# Altium PCB PCB1.PcbDoc
Units mm, origin at the board's own origin, x right, y up, seen from the top; angles counter-clockwise.
Board outline 133.35 x 94.25 mm, 2 copper layers (Top Layer, Bottom Layer); 32 components, 22 nets, 83 pads, 15 vias.
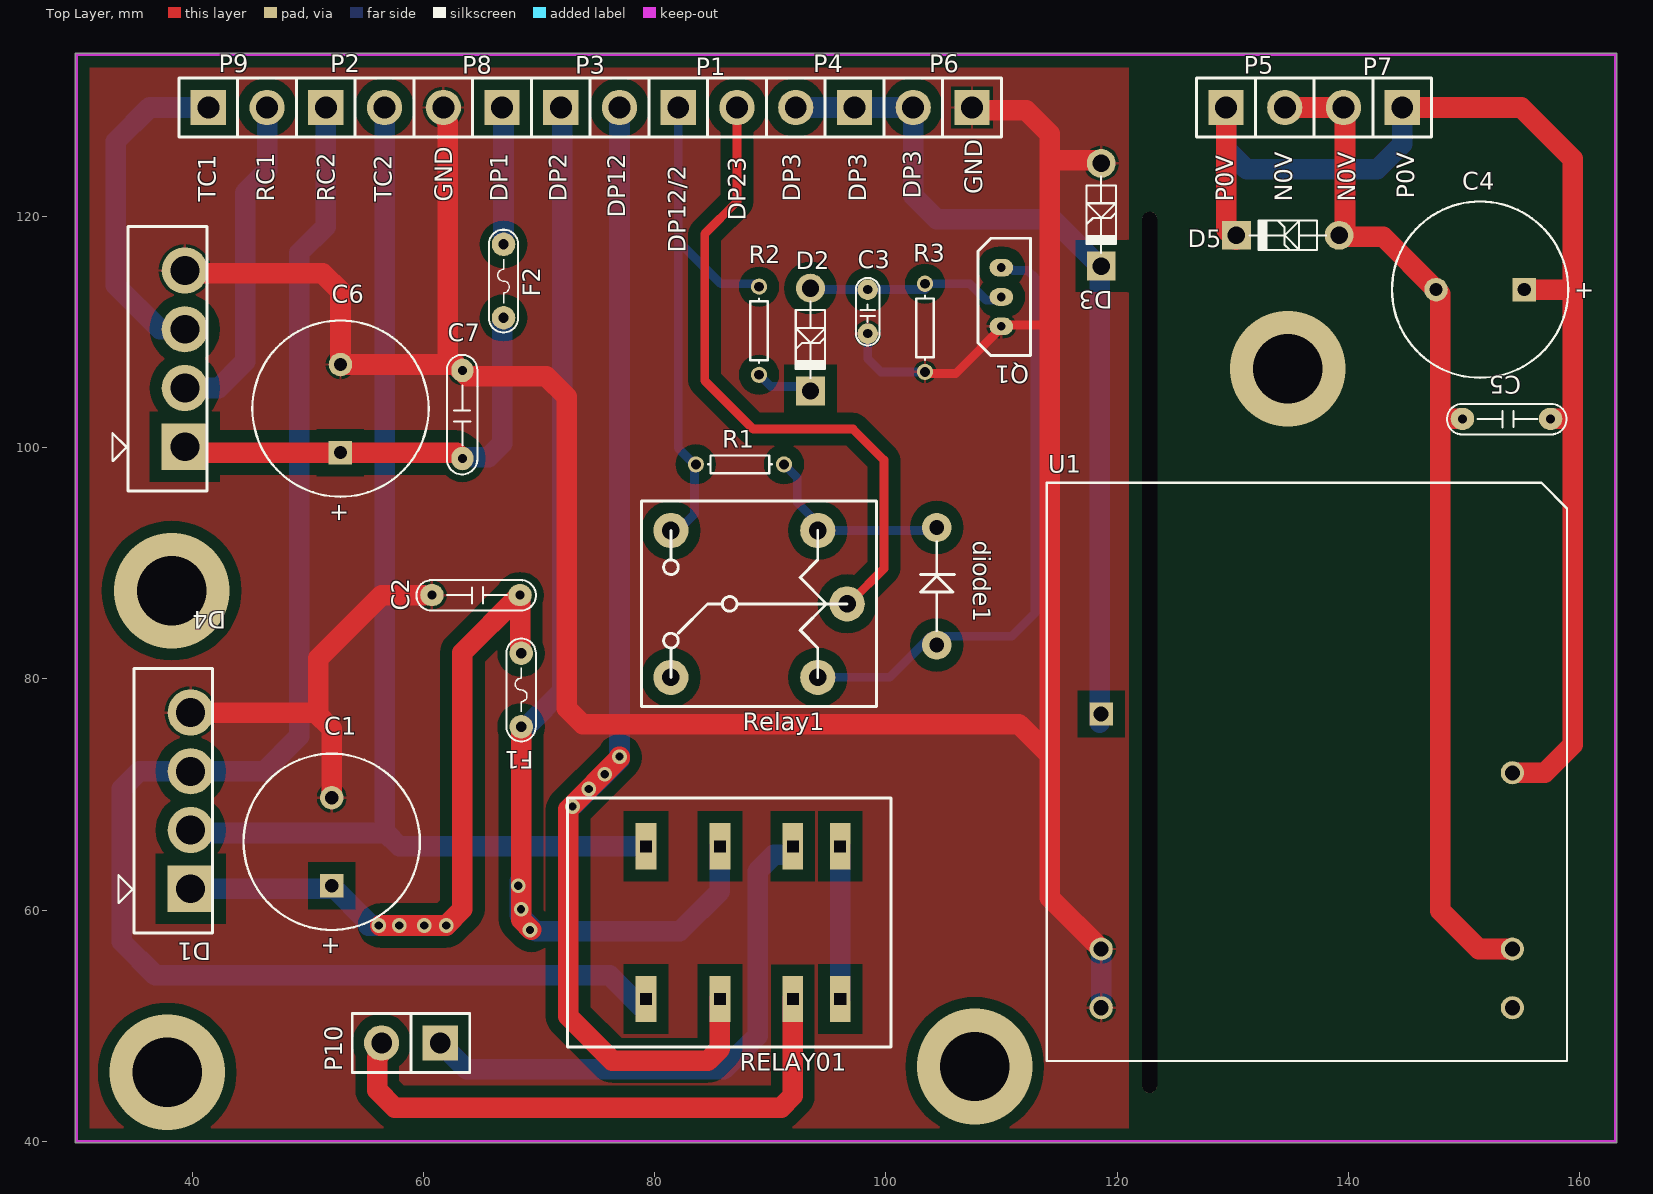
[diagram p0: Top Layer view]
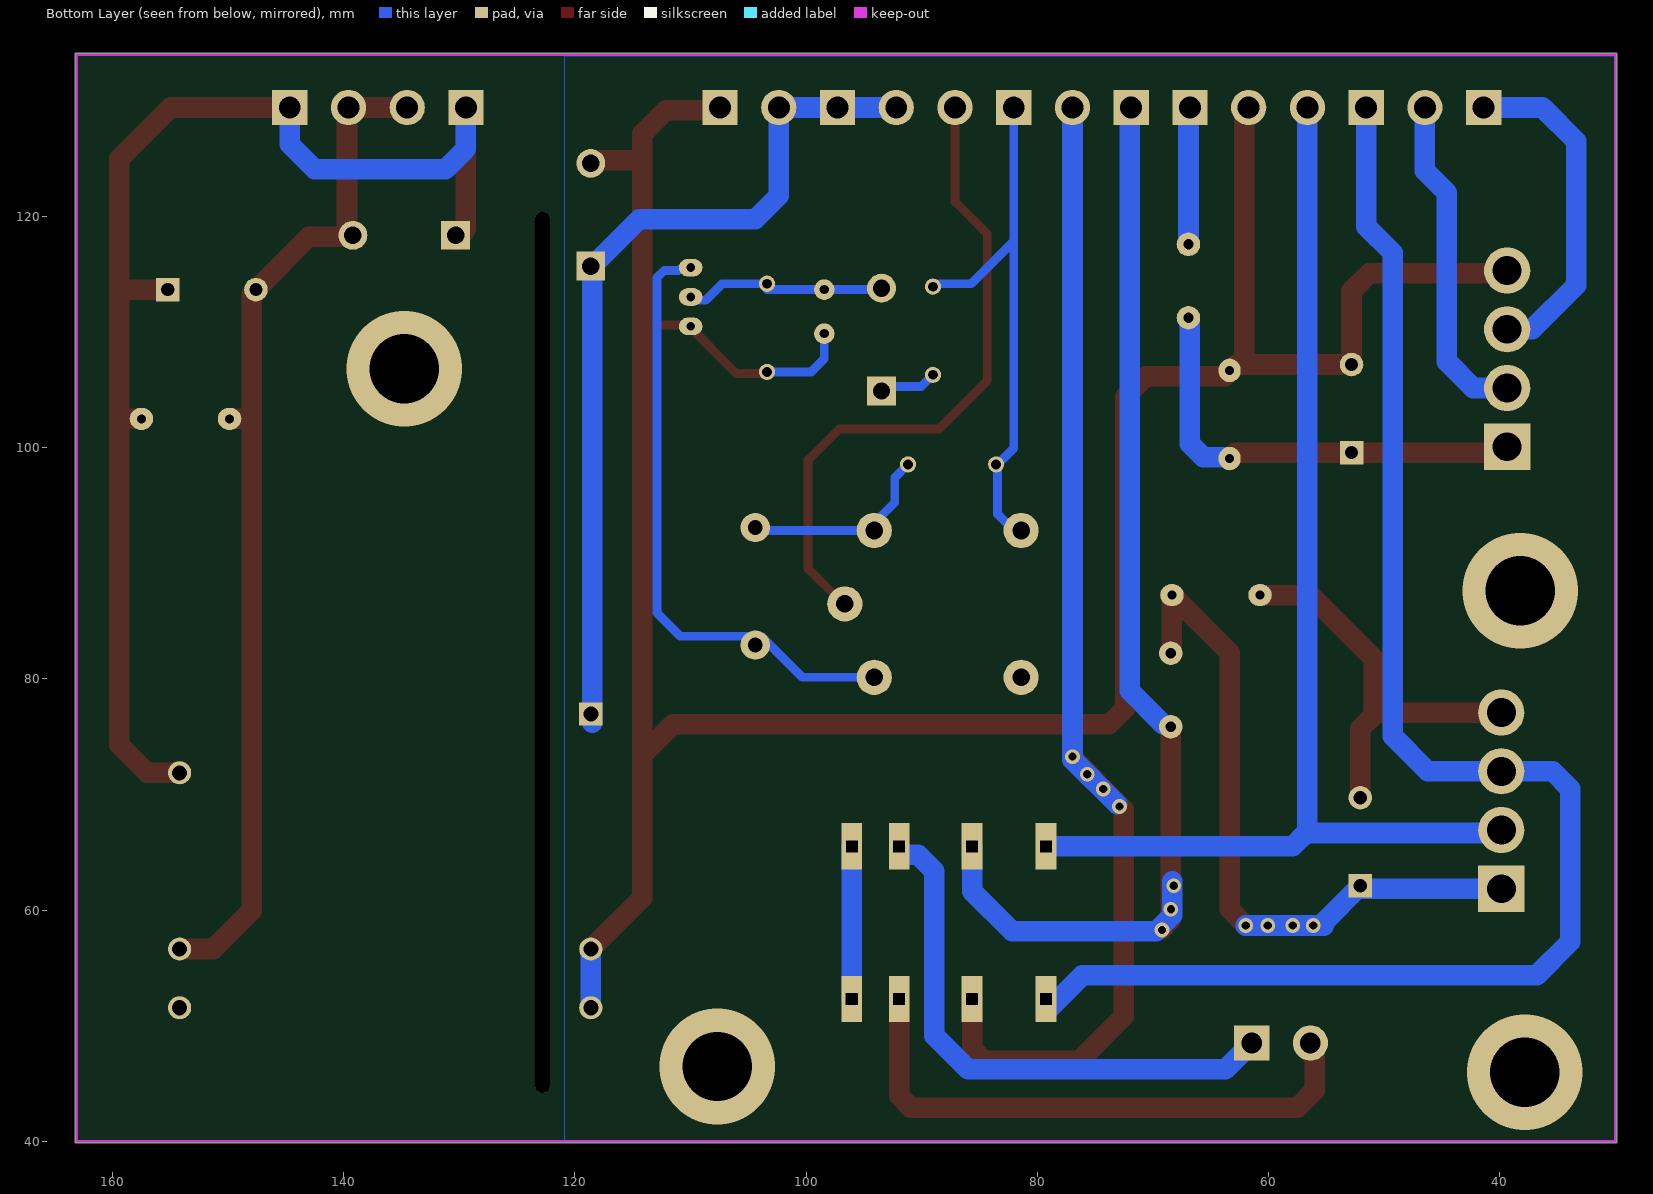
[diagram p1: Bottom Layer view, seen from below]

## Layer stack, top to bottom
Top Solder: solder mask 0.0102, Solder Resist, Dk 3.5
Top Layer: signal copper 0.0356
Dielectric 1: dielectric 0.32, FR-4, Dk 4.8
Bottom Layer: signal copper 0.0356
Bottom Solder: solder mask 0.0102, Solder Resist, Dk 3.5

## Board outline
30,39.873 cw(c30,40) 29.873,40 29.873,134 cw(c30,134) 30,134.127 163,134.127 cw(c163,134) 163.048,134.118 cw(c163.096,134) 163.223,134 163.223,40 cw(c163.096,40) 163.048,39.882 cw(c163,40) 163,39.873

## Design rules (kind name [scope] priority, off if disabled: settings)
Clearance [All] p1: gap=1.016 ignorepadtopadclearanceinfootprint=FALSE
PolygonConnect [All] p1: connectstyle=Relief reliefconductorwidth=0.254 reliefentries=4 polygonreliefangle="90 Angle" airgapwidth=0.254
RoutingVias [All] p1: holewidth=0.711 width=1.27 viastyle="Through Hole" minholewidth=0.711 minwidth=1.27 maxholewidth=0.711 maxwidth=1.27
SolderMaskExpansion [All] p1: expansion=0.102
Width [All] p1: maxlimit=2.54 minlimit=0.254 preferedwidth=0.762
30 further rules are at their usual default settings.

## Components (designator, comment, footprint, x,y, rotation, side; value= is the part's Value field where it differs from the comment)
C1 "1000uF/25" RB7.6-15 52.07,65.913 r270 top value=100pF
C2 "104" CN3 64.548,87.249 r0 top value=0,047uF
C3 "104" CN1.5 98.425,111.633 r90 top value=100pF
C4 "1000uF/25" RB7.6-15 151.384,113.665 r0 top value=100pF
C5 "104" CN3 153.67,102.489 r0 top value=0,047uF
C6 "1000uF/25" RB7.6-15 52.832,103.378 r270 top value=100pF
C7 "104" CN3 63.373,102.87 r270 top value=0,047uF
D1 "Bridge2" KBU1010 39.878,61.849 r270 top
D2 "D Zener" DZ1A 93.472,113.792 r90 top
D3 "D Zener" DZ1A 118.618,124.587 r90 top
D4 "Bridge2" KBU1010 39.37,100.076 r270 top
D5 "15V" DZ1A 139.192,118.364 r0 top
diode1 "Diode" "Diode s" 104.394,93.091 r270 top
F1 "F1A" Fuse 68.453,82.194 r270 top value=Fuse
F2 "F1A" Fuse 66.929,111.252 r90 top value=Fuse
P1 "Header 2" "CON2 5.08"#1 82.042,129.413 r0 top
P2 "Header 2" "CON2 5.08"#1 51.562,129.413 r0 top
P3 "Header 2" "CON2 5.08"#1 71.882,129.413 r0 top
P4 "Header 2" "CON2 5.08"#1 97.282,129.413 r180 top
P5 "Header 2" "CON2 5.08"#1 129.413,129.413 r0 top
P6 "Header 2" "CON2 5.08"#1 107.442,129.413 r180 top
P7 "Header 2" "CON2 5.08"#1 144.653,129.413 r180 top
P8 "Header 2" "CON2 5.08"#1 66.802,129.413 r180 top
P9 "Header 2" "CON2 5.08"#1 41.402,129.413 r0 top
P10 "Header 2" "CON2 5.08"#2 61.468,48.514 r180 top
Q1 "MOSFET-N" Mosfet 109.982,115.57 r270 top
R1 "Res1" AXIAL-0.3 87.376,98.552 r0 top value=1K
R2 "Res1" AXIAL-0.3 89.027,110.109 r90 top value=1K
R3 "Res1" AXIAL-0.3 103.378,110.363 r90 top value=1K
RELAY01 "DPDT 8 Pin Terminals Relay" "DPDT 8 Pin Terminals Relay" 79.248,52.324 r270 top
Relay1 "relay" Relay1 94.107,92.837 r270 top
U1 "PP15" PP15 118.618,76.962 r0 top

## Footprints (in the part's own frame and the unit in brackets; to place one, negate y for a bottom-side part, rotate by r counter-clockwise, add the part's x,y. Pads: shape width x height; smd on the part's side, far side on the other; paste and mask are expansions set on the pad)
AXIAL-0.3 [mm] "Axial Device, Thru-Hole; 2 Leads; 0.3 in Pin Spacing"
  round 1.4 hole 0.85: 1(-3.81,0) 2(3.81,0)
  silkscreen extent -2.77,-0.76 2.77,0.76
CN1.5 [mil]
  round 70 hole 31: 1(-70,0) 2(80,0)
  silkscreen extent -110,-40 120,40, body extent -110,-33 120,33, height 235
CN3 [mil] "Cap np W 0.3"
  oval 80x75 hole 31: 1(-150,0) 2(150,0)
  silkscreen extent -203,-53 204,51, body extent -158,-40 158,54, height 419
"CON2 5.08"#1 [mil]
  rect 120x120 hole 74.8: 1(0,0)
  round 120 hole 74.8: 2(200,0)
  silkscreen extent -100,-100 300,100
"CON2 5.08"#2 [mil]
  rect 120x120 hole 70: 1(0,0)
  round 120 hole 70: 2(200,0)
  silkscreen extent -100,-100 300,100
"Diode s" [mm] "Diode"
  round 2.54 hole 1.27: 1(10.16,0) 2(0,0)
  silkscreen extent 1.27,-1.4 8.89,1.52
"DPDT 8 Pin Terminals Relay" [mm]
  rect 4x1.8 hole 1 square: 1(0,0) 2(0,6.4) 3(0,12.7) 4(0,16.8) 5(-13.2,16.8) 6(-13.2,12.7) 7(-13.2,6.4) 8(-13.2,0)
  silkscreen extent -17.37,-6.8 4.15,21.18, body extent -17.37,-6.83 4.15,21.18, height 35
DZ1A [mm] "Diode 1A, W 100mil, L 350mil"
  round 2.5 hole 1.5: 1(0,0)
  rect 2.5x2.5 hole 1.5: 2(-8.89,0)
  silkscreen extent -7.75,-1.27 -1.14,1.27, body extent -8.79,-1.65 -0.38,1.02, height 3.06
Fuse [mil]
  round 80 hole 35: 1(-1,0) 2(249,0)
  silkscreen extent -51,-50 299,50
KBU1010 [mm] "Bridge rectifier 10A"
  rect 4x4 hole 2.5: 1(0,0)
  round 4 hole 2.5: 2(-5.08,0) 3(-10.16,0) 4(-15.24,0)
  silkscreen extent -19.05,-6.25 3.81,1.9, body extent -19.05,-4.9 3.84,1.91, height 19
Mosfet [mil]
  oval 60x80 hole 30: 1(0,0) 2(100,0) 3(200,0)
  silkscreen extent -100,-80 300,100
PP15 [mm]
  rect 2x2 hole 1.3: 1(0,0)
  round 2 hole 1.3: 2(0,-20.32) 3(0,-25.4) 4(35.56,-25.4) 5(35.56,-20.32) 6(35.56,-5.08)
  silkscreen extent -4.72,-30 40.28,20, body extent -4.14,-29.91 40.92,20.05, height 8
RB7.6-15 [mil] "Polarized Capacitor (Radial); 2 Leads"
  rect 80x80 hole 45: 1(150,0)
  round 80 hole 45: 2(-150,0)
  silkscreen extent -300,-300 300,300
Relay1 [mil]
  round 120 hole 60: 1(250,100) 2(500,-500) 3(0,-500) 4(0,0) 5(500,0)
  silkscreen extent -100,-600 600,200

## Part data
C1 C4 C6: library part "Cap Pol1", "Polarized Capacitor (Radial)", LatestRevisionDate=17-Jul-2002, LatestRevisionNote="Re-released for DXP Platform.", PackageDescription="Polarized Capacitor (Radial); 2 Leads", PackageReference=RB7.6-15, Published=8-Jun-2000, Publisher="Altium Limited"
C2 C5 C7: library part CN3, "Cap np W0.3", Copyright=VanDungEvn
C3: library part Cap, "Capacitor", LatestRevisionDate=17-Jul-2002, LatestRevisionNote="Re-released for DXP Platform.", PackageDescription="Radial Cap, Thru-Hole; 2 Leads; 0.3 in Pin Spacing", PackageReference=RAD-0.3, Published=8-Jun-2000, Publisher="Altium Limited"
D1 D4: "Diode Bridge", LatestRevisionDate=17-Jul-2002, LatestRevisionNote="Re-released for DXP Platform.", PackageDescription="Bridge Rectifier; 4 Terminals; Body 16.8 x 16.8 mm (typ); Pitch 10.67 mm", PackageReference=D-46_6A, Published=24-Mar-1999, Publisher="Altium Limited"
D2 D3: "Zener Diode", LatestRevisionDate=17-Jul-2002, LatestRevisionNote="Re-released for DXP Platform.", PackageDescription="Diode, Thru-Hole; 2 Leads; 0.7 in Pin Spacing", PackageReference=DIODE-0.7, Published=8-Jun-2000, Publisher="Altium Limited"
D5: library part "D Zener", "Zener Diode", LatestRevisionDate=17-Jul-2002, LatestRevisionNote="Re-released for DXP Platform.", PackageDescription="Diode, Thru-Hole; 2 Leads; 0.7 in Pin Spacing", PackageReference=DIODE-0.7, Published=8-Jun-2000, Publisher="Altium Limited"
F1 F2: library part Fuse, "Fuse", Designed by=VanDungEvn
P1 P2 P3 P4 P5 P6 P7 P8 P9 P10: "Header, 2-Pin", LatestRevisionDate=17-Jul-2002, LatestRevisionNote="Re-released for DXP Platform.", Publisher="Altium Limited"
Q1: "N-Channel MOSFET", LatestRevisionDate=17-Jul-2002, LatestRevisionNote="Re-released for DXP Platform.", PackageDescription="TO, Flat Index; 3 In-Line, Axial Leads; Body Dia. 4.6mm; Lead Dia. 0.5 mm (max)", PackageReference=E3, PackageVersion=1995/1996, Published=8-Jun-2000, Publisher="Altium Limited"
R1 R2 R3: "Resistor", LatestRevisionDate=17-Jul-2002, LatestRevisionNote="Re-released for DXP Platform.", PackageDescription="Axial Device, Thru-Hole; 2 Leads; 0.3 in Pin Spacing", PackageReference=AXIAL-0.3, Published=8-Jun-2000, Publisher="Altium Limited"
Relay1: library part Relay, "SPDT Relay", LatestRevisionDate=17-Jul-2002, LatestRevisionNote="Re-released for DXP Platform.", PackageReference=MODULE5B, Published=8-Jun-2000, Publisher="Altium Limited"

## Free pads (board coordinates)
  oval 1.27x76.2 hole 1.27 slot 76.2 at 90 deg unplated: 2(122.809,82.296)

## Via types
v1: diameter 1.27, hole 0.711, Top Layer to Bottom Layer, 11 vias
v2: diameter 10, hole 6, Top Layer to Bottom Layer, 4 vias

## Nets (pads, with @x,y where several pads share a name; then routed paths per layer and width w, separated by ;. In a path a pad name is that pad's centre, name@x,y a point inside that pad or via, vN(x,y) a via of type N, cw(c..) or ccw(c..) an arc to the next point about the centre after c; other vN are vias at no path point)
DP1: C6.1 C7.2 D4.1 F2.1 | length 39.4
  Top Layer w1.778: D4.1 39.878,99.568 C6.1 62.865,99.568 63.285,99.148 63.314,99.148 63.373,99.089 C7.2
  Bottom Layer w1.778: C7.2 63.373,99.089 63.432,99.148 63.461,99.148 63.5,99.187 65.659,99.187 66.802,100.33 66.802,111.031 66.929,111.158 F2.1
DP2: F1.2 P3.1 RELAY01.7 | length 98.7
  Top Layer w1.778: F1.2 68.453,59.182 v1@69.342,58.293
  Bottom Layer w1.778: v1@68.326,62.484 68.326,59.563 69.723,58.166 82.169,58.166 85.648,61.645 RELAY01.7 ; F1.2@69.088,76.048 72.009,78.969 P3.1@72.009,129.413
  other v1: 69.215,58.293 68.453,60.071 68.199,62.103
DP3: D3.2 P4.1 P4.2 P6.2 U1.1 | length 75.9
  Bottom Layer w1.778: P4.2 P4.1 P6.2 102.362,121.793 104.394,119.761 114.427,119.761 118.491,115.697 U1.1@118.491,76.2
DP12: P3.2 RELAY01.2 | length 105.6
  Top Layer w1.778: v1(76.962,73.279) 76.962,73.152 72.517,68.707 72.517,50.826 76.353,46.99 84.606,46.99 85.648,48.032 RELAY01.2
  Bottom Layer w1.778: v1@73.088,69.151 76.962,73.025 P3.2
  other v1: 72.898,68.961 74.295,70.485 75.692,71.755
DP12/2: P1.1 R1.1 R2.2 Relay1.3 | length 46.2
  Bottom Layer w0.762: Relay1.3@82.042,92.837 83.439,94.234 83.439,98.552 82.042,99.949 82.042,100.838 82.042,115.951 82.042,117.856 ; P1.1 82.042,117.856 ; R2.2@89.027,114.173 85.725,114.173 82.042,117.856
DP23: P1.2 Relay1.1 | length 56.5
  Top Layer w0.762: P1.2 87.122,121.285 84.328,118.491 84.328,105.791 88.519,101.6 97.155,101.6 99.822,98.933 99.822,89.535 Relay1.1@97.028,86.741
GND: C1.2 C2.1 C3.1 C6.2 C7.1 D1.4 D3.1 D4.4 P6.1 P8.2 Q1.3 R3.1 U1.2 U1.3 | length 278.7
  Top Layer w0.762: R3.1@103.405,106.399 106.018,106.399 110.236,110.617 114.173,110.617
  Top Layer w1.778: D4.4 39.564,115.122 40.283,115.122 40.342,115.062 51.308,115.062 52.832,113.538 C6.2 62.103,107.188 ; D1.4 50.673,77.089 ; C1.2 52.07,75.692 50.673,77.089 ; C2.1@60.071,87.249 56.388,87.249 50.927,81.788 50.927,77.343 50.673,77.089 ; P8.2 61.965,129.17 61.965,128.272 62.103,128.134 62.103,107.188 ; P6.1@107.442,129.159 112.141,129.159 114.173,127.127 114.173,124.841 ; U1.2 114.173,61.087 114.173,73.406 ; D3.1 118.549,124.587 118.295,124.841 114.173,124.841 ; 62.103,107.188 62.738,107.188 63.754,106.172 70.612,106.172 72.39,104.394 72.39,77.47 73.787,76.073 111.506,76.073 114.173,73.406 ; 114.173,73.406 114.173,110.617 114.173,124.841
  Bottom Layer w0.762: C3.1 98.425,107.696 99.568,106.553 R3.1
  Bottom Layer w1.778: U1.2@118.558,56.642 U1.2 U1.3
N0V: C4.2 C5.1 D5.1 P5.2 P7.2 U1.5 | length 89.5
  Top Layer w1.778: P5.2 P7.2 139.7,129.286 139.7,118.237 143.002,118.237 C4.2 147.955,113.284 147.955,102.362 ; C5.1 148.082,102.489 147.955,102.362 ; U1.5 151.257,56.642 147.955,59.944 147.955,102.362
NetC1_1: C1.1 C2.2 D1.1 F1.1 | length 65.9
  Top Layer w1.778: v1@56.261,58.674 v1(61.976,58.674) 63.373,60.071 63.373,82.264 68.231,87.122 68.231,87.151 68.329,87.249 C2.2 68.358,82.383 68.453,82.289 F1.1 F1.1@68.522,82.22
  Bottom Layer w1.778: D1.1 51.816,61.849 C1.1 55.245,58.928 55.245,58.674 v1(61.976,58.674)
  other v1: 56.134,58.674 57.912,58.674 60.071,58.674
NetC3_2: C3.2 D2.1 Q1.2 R3.2 | length 17
  Bottom Layer w0.762: D2.1@93.599,113.665 C3.2 R3.2@103.378,113.665 ; R3.2 107.264,114.173 108.687,112.751 Q1.2@109.982,112.751
NetD2_2: D2.2 R2.1 | length 4.3
  Bottom Layer w0.762: R2.1@89.154,106.172 90.043,105.283 D2.2@93.091,105.283
Netdiode1_1: diode1.1 Q1.1 Relay1.5 | length 52.7
  Bottom Layer w0.762: Relay1.5@94.742,80.137 100.33,80.137 103.886,83.693 110.871,83.693 112.903,85.725 112.903,114.681 112.268,115.316 111.029,115.316 110.921,115.424 110.128,115.424 Q1.1
Netdiode1_2: diode1.2 R1.2 Relay1.4 | length 16.3
  Bottom Layer w0.762: R1.2 92.329,97.409 92.329,95.25 94.742,92.837 diode1.2@103.886,92.837
NetF2_2: F2.2 P8.1 | length 11.9
  Bottom Layer w1.778: P8.1 66.929,129.286 F2.2
NetP10_1: P10.1 RELAY01.6 | length 48.2
  Bottom Layer w1.778: P10.1 63.754,46.228 85.979,46.228 88.9,49.149 88.9,63.373 90.323,64.796 91.937,64.796 91.948,64.807 RELAY01.6
NetP10_2: P10.2 RELAY01.3 | length 49.6
  Top Layer w1.778: P10.2 56.145,48.271 56.145,47.373 56.007,47.235 56.007,44.45 57.531,42.926 90.932,42.926 91.948,43.942 RELAY01.3
NetRELAY01_4: RELAY01.4 RELAY01.5 | length 13.2
  Bottom Layer w1.778: RELAY01.4 RELAY01.5
P0V: C4.1 C5.2 D5.2 P5.1 P7.1 U1.6 | length 115
  Top Layer w1.778: P5.1 129.413,118.872 D5.2@130.302,117.983 ; P7.1 154.94,129.413 159.385,124.968 159.385,113.665 ; U1.6 156.972,71.882 159.385,74.295 159.385,102.362 ; C4.1 159.385,113.665 ; C5.2 159.258,102.489 159.385,102.362 ; 159.385,102.362 159.385,113.665
  Bottom Layer w1.778: P5.1 129.413,125.857 131.191,124.079 142.494,124.079 144.653,126.238 P7.1
RC1: D4.2 P9.2 | length 28.9
  Bottom Layer w1.778: D4.2 42.291,105.156 44.577,107.442 44.577,122.047 46.482,123.952 P9.2
RC2: D1.3 P2.1 RELAY01.1 | length 134.7
  Bottom Layer w1.778: P2.1 51.562,119.126 49.276,116.84 49.276,75.057 46.228,72.009 D1.3 35.433,72.009 33.909,70.485 33.909,57.277 36.83,54.356 76.116,54.356 79.248,51.224 RELAY01.1
TC1: D4.3 P9.1 | length 29.2
  Bottom Layer w1.778: D4.3 39.354,110.252 37.195,110.252 33.401,114.046 33.401,126.492 36.322,129.413 P9.1
TC2: D1.2 P2.2 RELAY01.8 | length 102.4
  Bottom Layer w1.778: D1.2 40.072,66.735 40.791,66.735 40.85,66.675 56.769,66.675 57.92,65.524 RELAY01.8 ; 56.642,66.929 P2.2
pads on no net: Relay1.2 U1.4
copper on no net:
  other v2: 37.846,45.974 107.681,46.482 38.232,87.63 134.747,106.807

## Polygon pours and split planes (outlines as drawn)
GND on Top Layer "GND_L01_P000" (solid, remove dead copper, pour order 0): 30.099,134.239 30.241,134.097 121.003,134.097 121.003,40.366 120.876,40.239 30.099,40.239
no net on Bottom Layer "NONET_L02_P002" (solid, remove dead copper, pour order 2): 30,134 30.142,133.858 120.904,133.858 120.904,40.127 120.777,40 30,40

## Keep-outs
Keep-Out Layer:
  lines w0.254: 163,40 30,40 30,134 163,134 ; 163.096,40 163.096,134

## Silkscreen, mask and mechanical layers (free items; w line width, h text height)
Top Overlay:
  text "GND" at 108.331,121.92 h1.52 r90
  text "DP3" at 102.997,121.539 h1.52 r90
  text "P0V" at 145.669,121.539 h1.52 r90
  text "TC1" at 42.037,121.285 h1.52 r90
  text "RC1" at 47.117,121.285 h1.52 r90
  text "RC2" at 52.324,121.285 h1.52 r90
  text "TC2" at 57.277,121.285 h1.52 r90
  text "GND" at 62.484,121.285 h1.52 r90
  text "DP1" at 67.31,121.285 h1.52 r90
  text "DP2" at 72.39,121.285 h1.52 r90
  text "DP3" at 92.583,121.285 h1.52 r90
  text "DP3" at 98.298,121.285 h1.52 r90
  text "P0V" at 130.048,121.285 h1.52 r90
  text "N0V" at 135.128,121.285 h1.52 r90
  text "N0V" at 140.589,121.285 h1.52 r90
  text "DP12" at 77.47,119.888 h1.52 r90
  text "DP23" at 87.884,119.634 h1.52 r90
  text "DP12/2" at 82.677,116.84 h1.52 r90

## Text inside footprints (layer, text, board x,y; h text height)
C1: Top Overlay "+" at 51.333,57.781 h1.5 r270
C4: Top Overlay "+" at 159.516,112.928 h1.5
C6: Top Overlay "+" at 52.095,95.246 h1.5 r270